# Altium PCB SensWear-V1R2-Debug.PcbDoc (part 1 of 3)
Units mm, origin at the board's own origin, x right, y up, seen from the top; angles counter-clockwise.
Board outline 25 x 25 mm, 4 copper layers (Top, L2, L3, Bottom), stack 1.582 mm thick; 73 components, 63 nets, 295 pads, 106 vias.
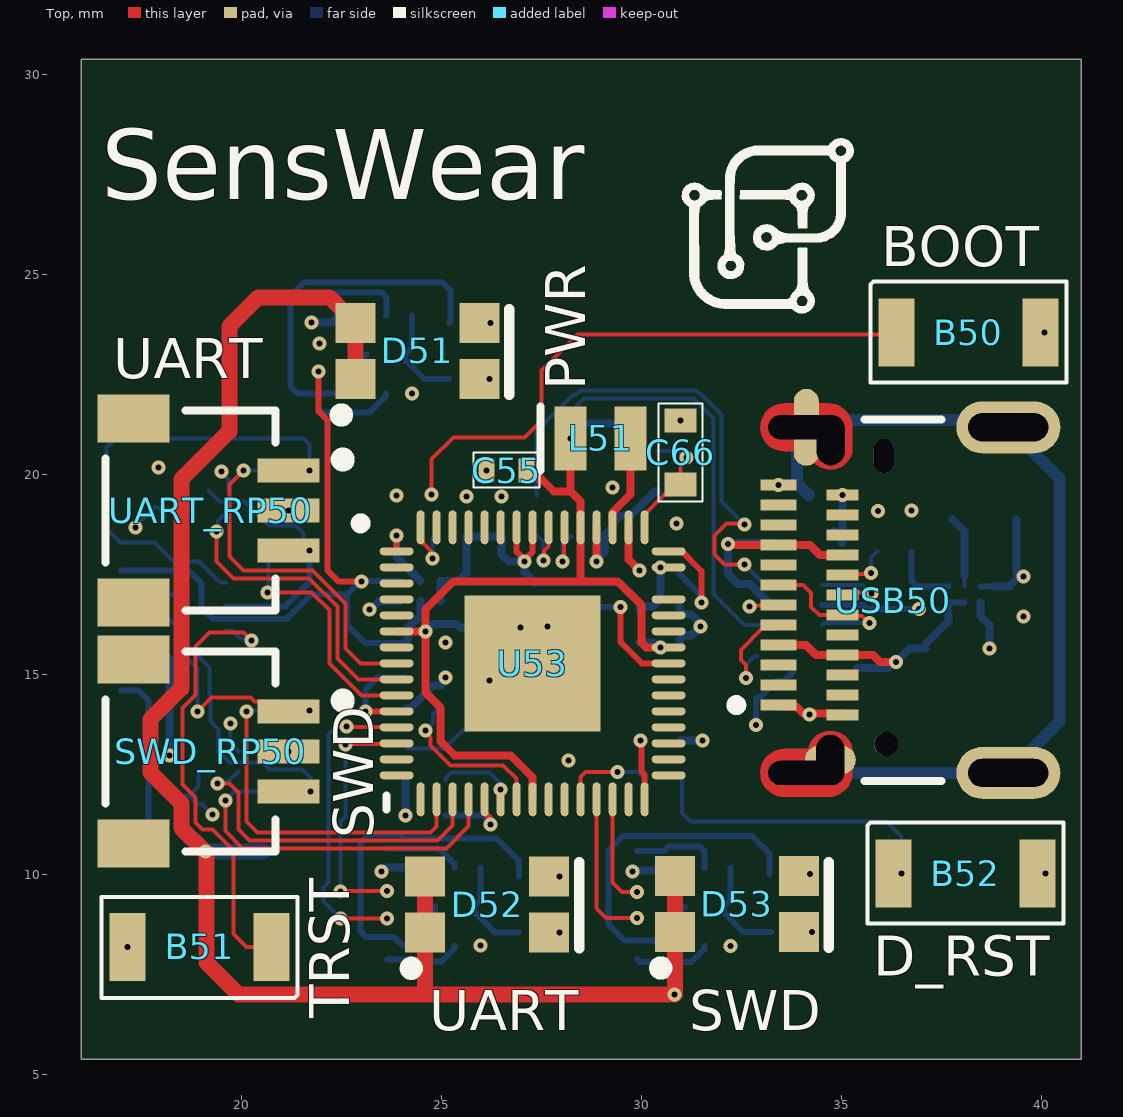
[diagram p0: Top view]
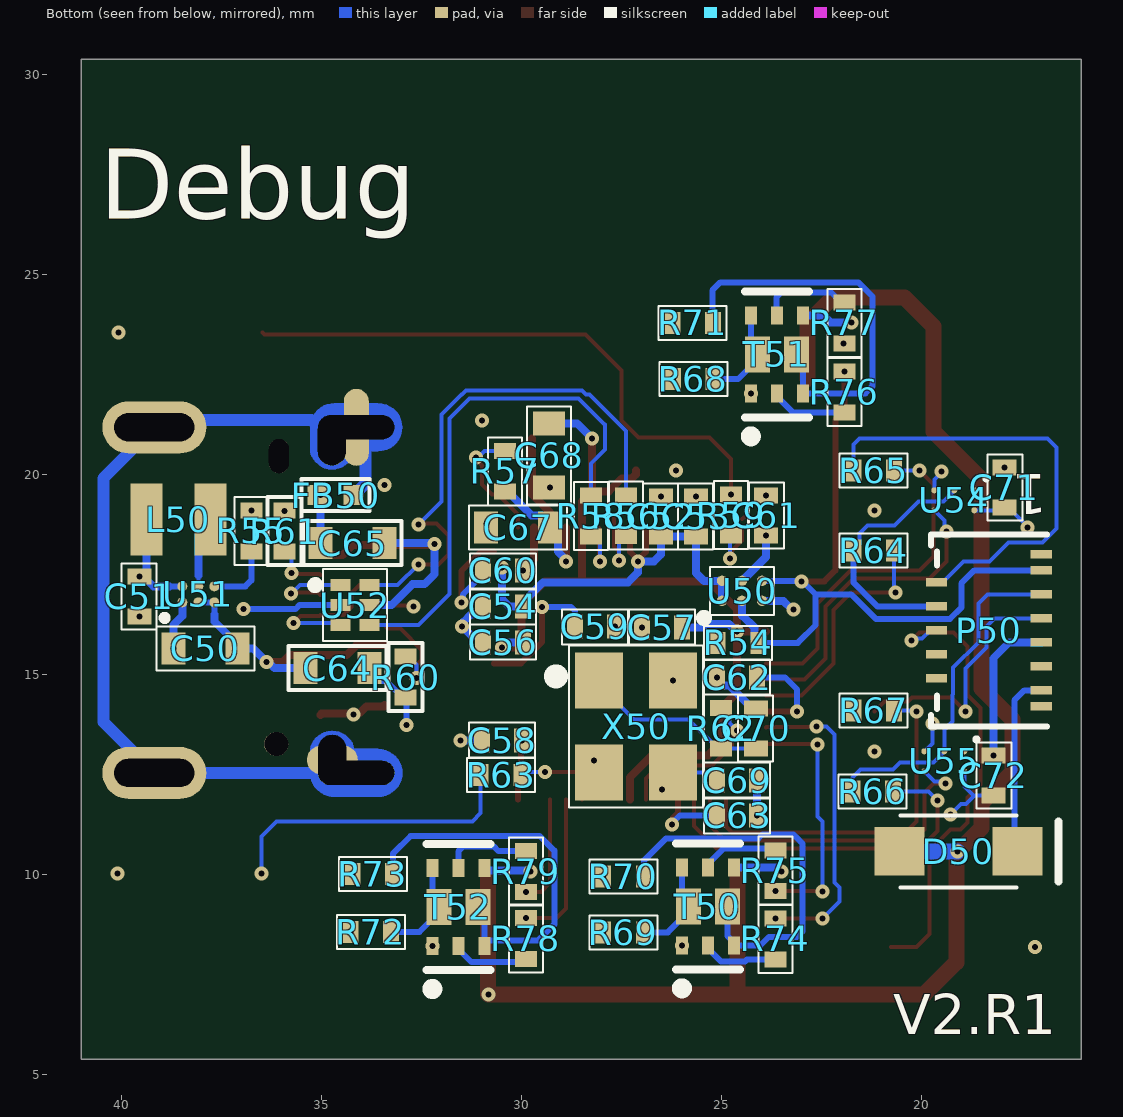
[diagram p1: Bottom view, seen from below]
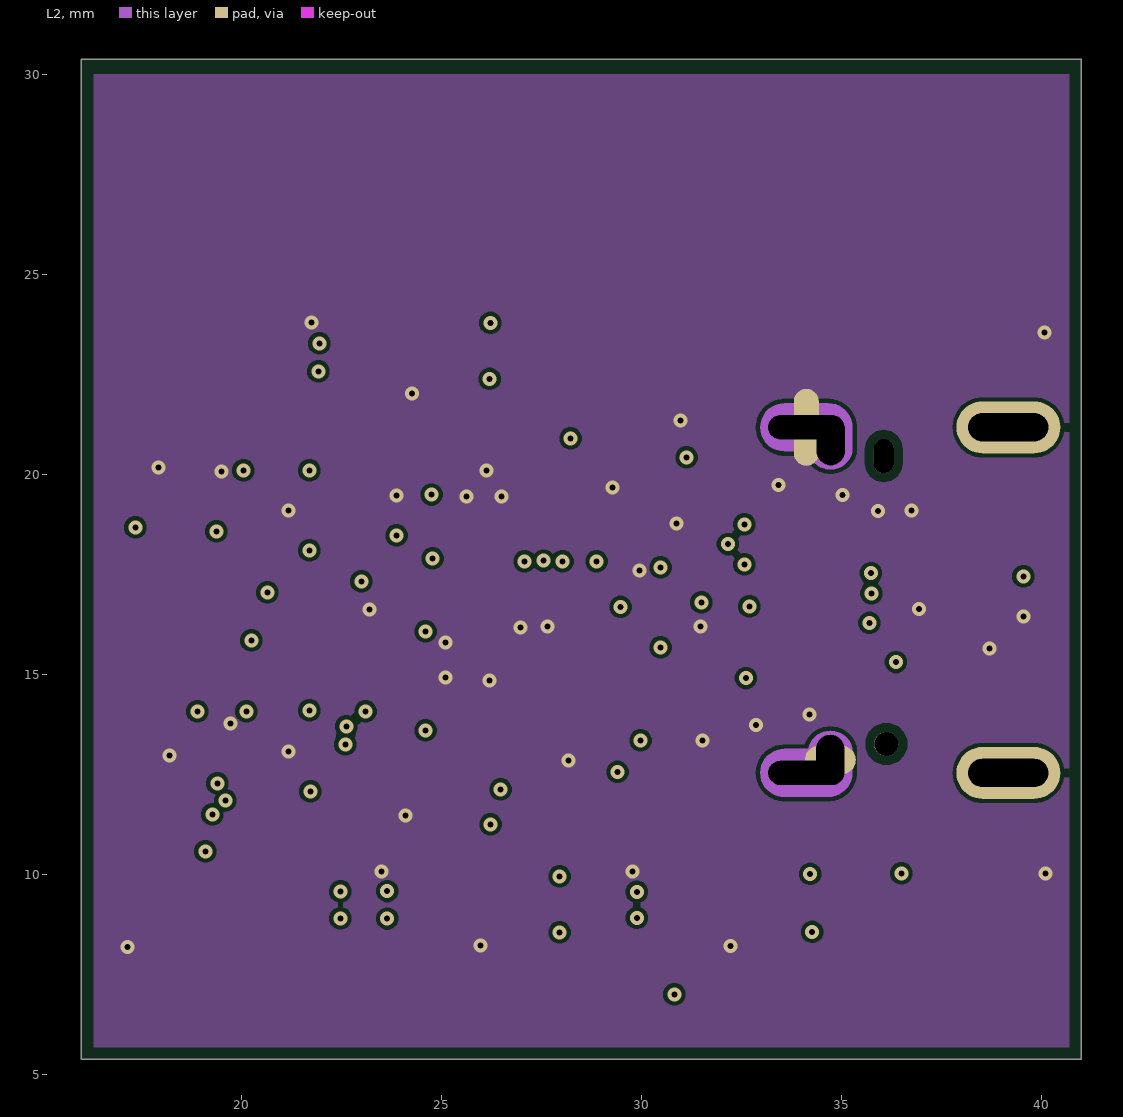
[diagram p2: L2]
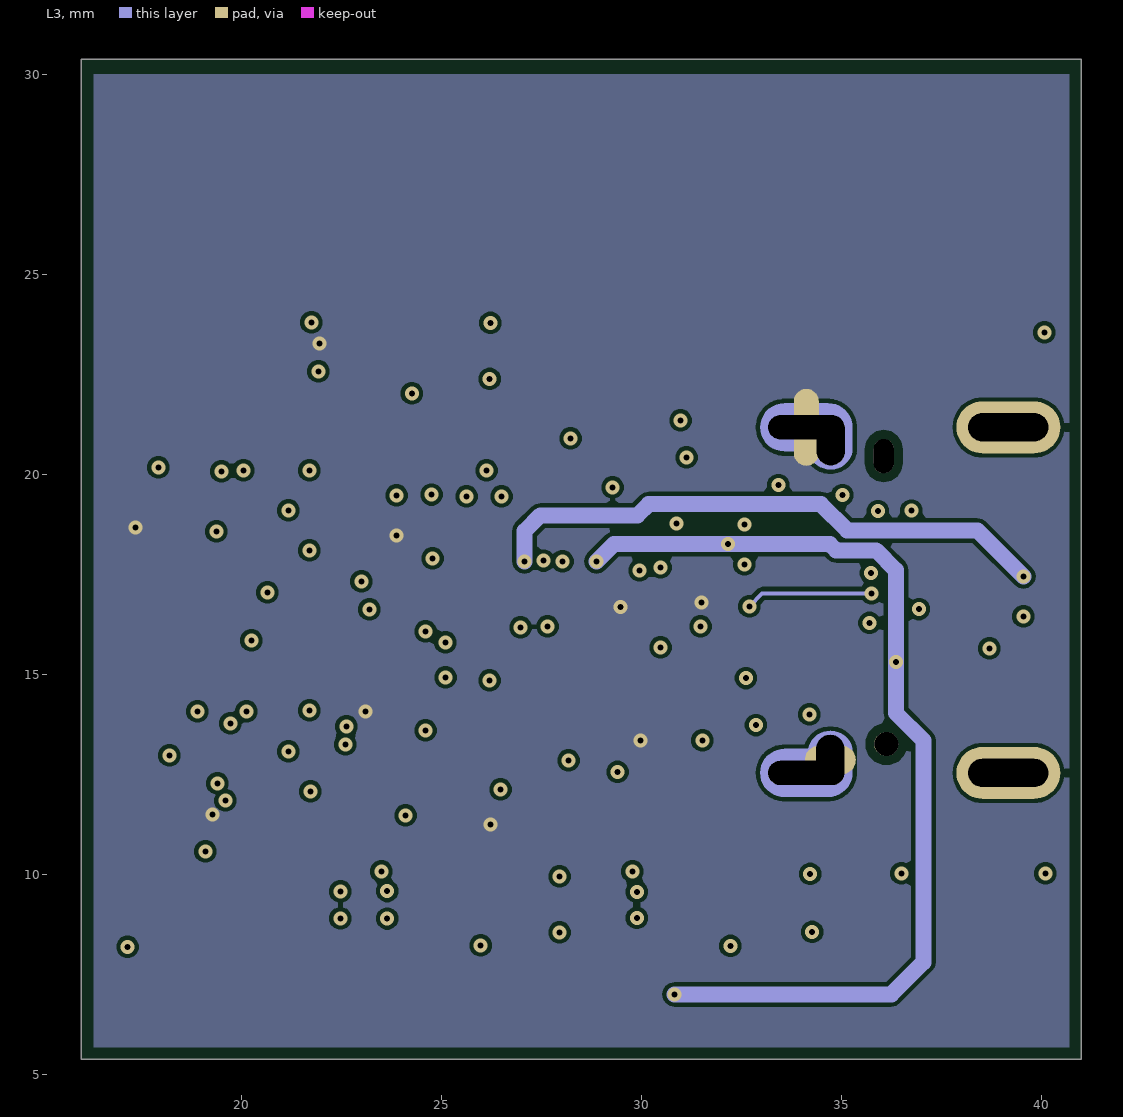
[diagram p3: L3]
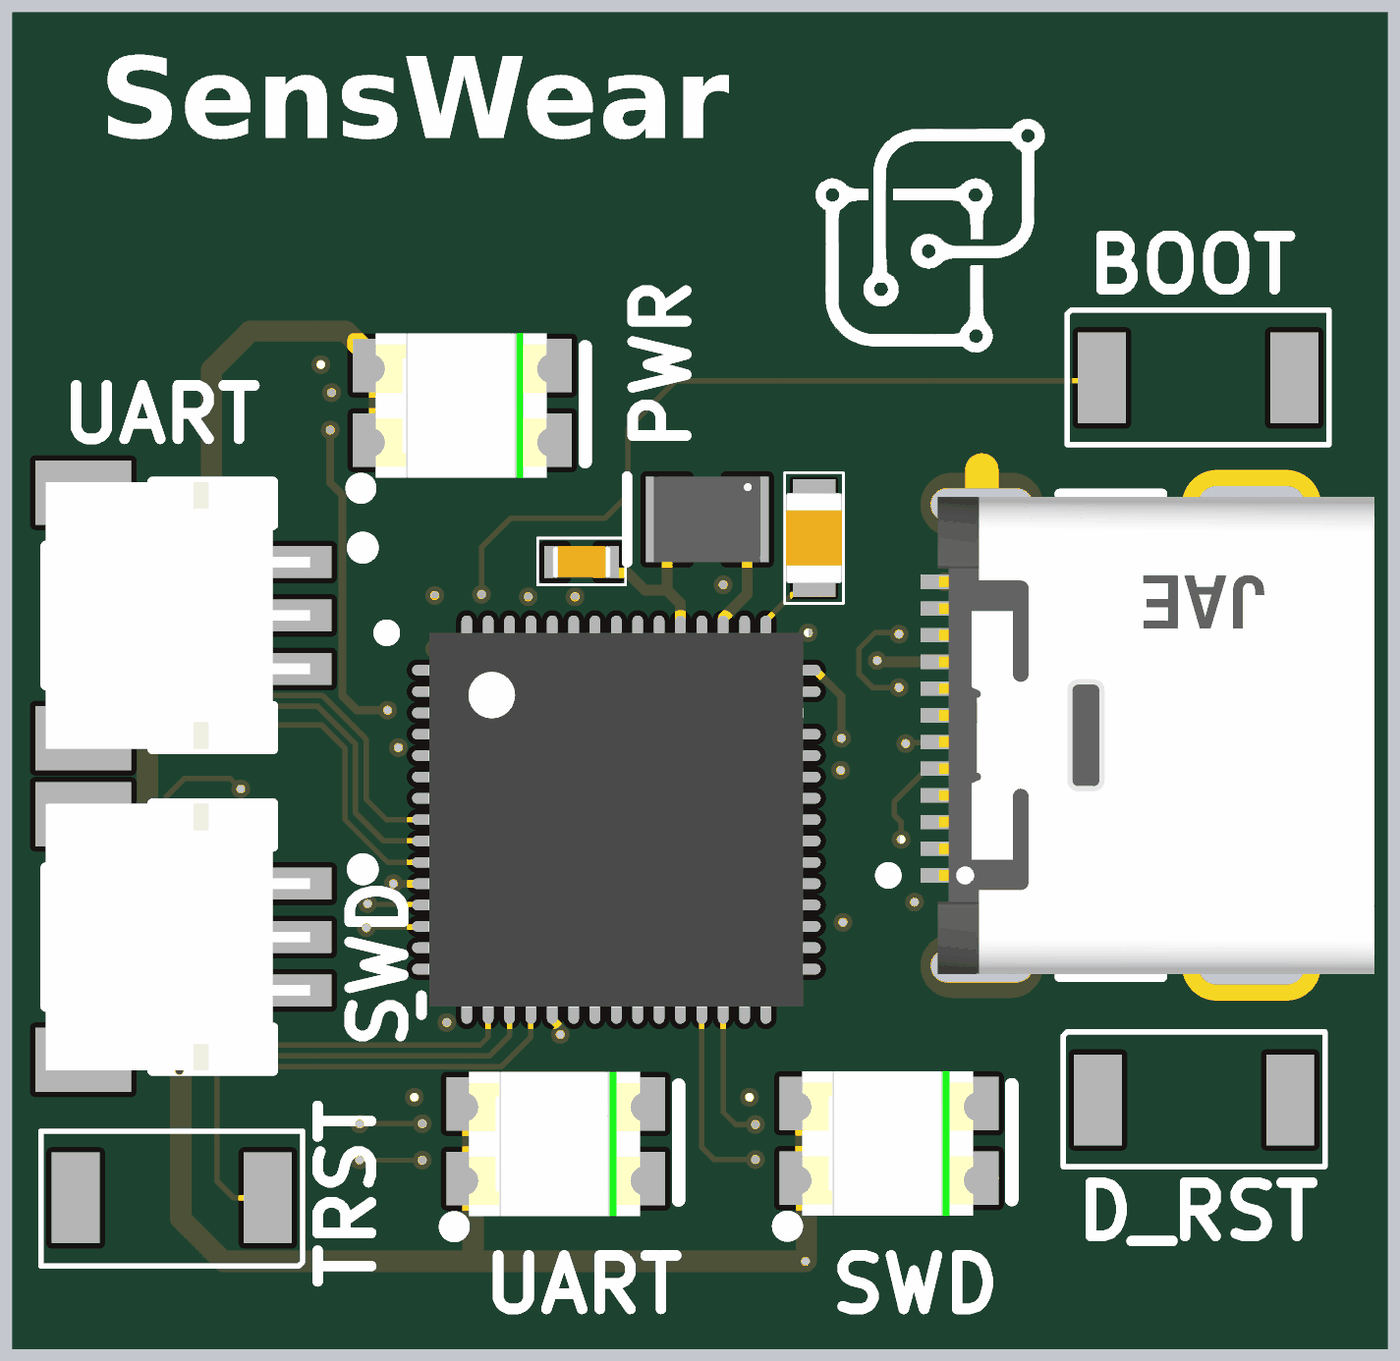
[diagram p5: 3D render of the assembled board from above, using the file's embedded part models]
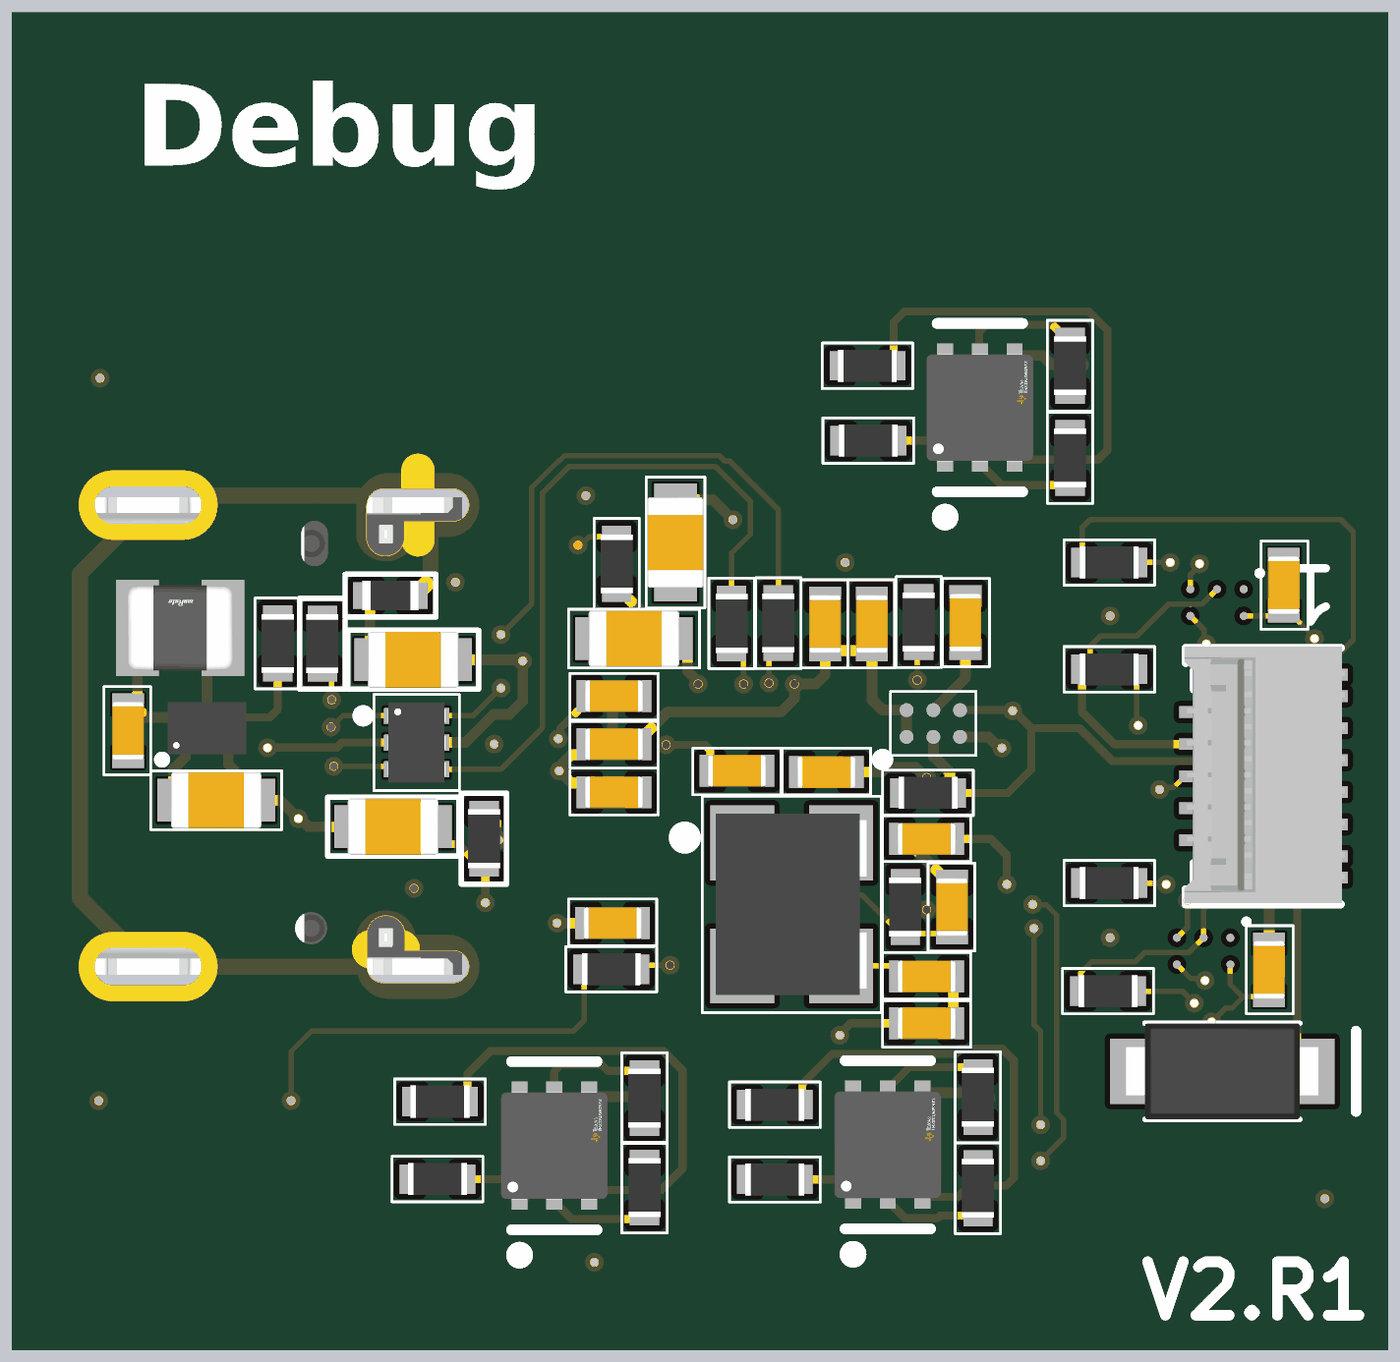
[diagram p6: 3D render of the assembled board from below, using the file's embedded part models]

## Layer stack, top to bottom
Top Mask: solder mask 0.015, Solder Resist, Dk 3.8
Top: signal copper 0.035
Dielectric 1: prepreg 0.2083, PP-022, Dk 4.15
L2: signal copper 0.0152
Core 2: core 1.065, Core-042, Dk 4.35
L3: signal copper 0.0152
Dielectric 3: prepreg 0.2083, PP-022, Dk 4.15
Bottom: signal copper 0.035
Bottom Mask: solder mask 0.015, Solder Resist, Dk 3.8

## Board outline
16,5.375 41,5.375 41,30.375 16,30.375

## Design rules (kind name [scope] priority, off if disabled: settings)
AcuteAngle [All] p1: minimum=4.50000000000000E+0001 checktracksonly=FALSE
AssemblyTestPointUsage [All] p1 off:
AssemblyTestpoint [All] p1 off: testpointundercomponent=TRUE minsize=1.016 maxsize=2.54 preferedsize=1.524 minholesize=0 maxholesize=1.016 preferedholesize=0.813 testpointgrid=0.025 usegrid=TRUE gridtolerance=0 allowsidetop=TRUE allowsidebottom=TRUE
BoardOutlineClearance BoardOutlineClearance_USB [InComponent('USB1')] p1: gap=0 ignorepadtopadclearanceinfootprint=FALSE
BoardOutlineClearance [All] p2: gap=0.3 ignorepadtopadclearanceinfootprint=FALSE
Clearance Clearance_USB_Self [InComponent('USB1') vs InComponent('USB1')] p1: gap=0 ignorepadtopadclearanceinfootprint=TRUE
Clearance Clearance_USB [(Name = 'USB1-S1') OR (Name = 'USB1-S2') OR (Name = 'USB1-S3') OR (Name = 'USB1-S4')] p2: gap=0 ignorepadtopadclearanceinfootprint=FALSE
Clearance "Clearance Non Plated Holes" [IsPad and not PadIsPlated and OnMultiLayer] p3: gap=0.22 ignorepadtopadclearanceinfootprint=FALSE
Clearance Clearance_RF_Nets [IsTrack And InNetClass('50Ohm') vs InNet('GND')] p4: gap=0.1 ignorepadtopadclearanceinfootprint=FALSE
Clearance Clearance_RF_Diff_Pairs [IsTrack And (OnLayer('L1') Or OnLayer('L8')) And InDifferentialPair('RF_ANT_9') vs (InNet('GND') AND InPolygon)] p5: gap=0.1 ignorepadtopadclearanceinfootprint=FALSE except(0: Arc-Hole Track-Hole SMDPad-Hole THPad-Hole Via-Hole Fill-Hole Poly-Hole Region-Hole Text-Hole)
Clearance "Pad Clearance" [IsPad vs IsPad] p6: gap=0.15 ignorepadtopadclearanceinfootprint=FALSE except(0: Arc-Hole Track-Hole SMDPad-Hole THPad-Hole Via-Hole Fill-Hole Poly-Hole Region-Hole Text-Hole)
Clearance uViaClearance [ISVia and InDrillLayerPair('L1 - L2 (GND)') vs ISPad] p7: gap=0.1 ignorepadtopadclearanceinfootprint=FALSE except(0: Arc-Hole Track-Hole SMDPad-Hole THPad-Hole Via-Hole Fill-Hole Poly-Hole Region-Hole Text-Hole)
Clearance "Pad Clearance_1" [IsPad vs IsTrack] p8: gap=0.1 ignorepadtopadclearanceinfootprint=FALSE except(0: Arc-Hole Track-Hole SMDPad-Hole THPad-Hole Via-Hole Fill-Hole Poly-Hole Region-Hole Text-Hole)
Clearance "Poly to Poly Outer Layers" [IsRegion AND (OnLayer('L1') OR OnLayer('L8')) vs IsRegion or IsTrack] p9: gap=0.1 ignorepadtopadclearanceinfootprint=FALSE except(0: Arc-Hole Track-Hole SMDPad-Hole THPad-Hole Via-Hole Fill-Hole Poly-Hole Region-Hole Text-Hole)
Clearance Clearance_KeepOutComponent [IsComponent vs OnLayer('Keep-Out Layer')] p10: gap=3 ignorepadtopadclearanceinfootprint=FALSE except(0: Arc-Hole Track-Hole SMDPad-Hole THPad-Hole Via-Hole Fill-Hole Poly-Hole Region-Hole Text-Hole)
Clearance Clearance_KeepOutSignal [InNetClass('All Nets') vs OnLayer('Keep-Out Layer')] p11: gap=0.2 ignorepadtopadclearanceinfootprint=FALSE except(0: Arc-Hole Track-Hole SMDPad-Hole THPad-Hole Via-Hole Fill-Hole Poly-Hole Region-Hole Text-Hole)
Clearance [All] p12: gap=0.1 ignorepadtopadclearanceinfootprint=FALSE except(0: Arc-Hole Track-Hole SMDPad-Hole THPad-Hole Via-Hole Fill-Hole Poly-Hole Region-Hole Text-Hole)
ComponentClearance [All] p1: gap=0.1 collisioncheckmode=3 verticalgap=0.254 showdistances=TRUE
DiffPairsRouting DiffPair_BT_RF_ANT [InDifferentialPair ('RF_ANT_9')] p1: maxlimit=0.5 minlimit=0.25 mostfreqgap=0.254 toplayer_maxgap=0.25 toplayer_prefgap=0.25 toplayer_minwidth=0.1 toplayer_maxwidth=0.12 toplayer_prefwidth=0.1 midlayer1_maxgap=0.254 midlayer1_minwidth=0.381 midlayer1_maxwidth=0.381 midlayer1_prefwidth=0.381 midlayer4_prefgap=0.25 midlayer4_minwidth=0.12 midlayer4_maxwidth=0.3 midlayer4_prefwidth=0.15 bottomlayer_prefgap=0.25 bottomlayer_minwidth=0.12 bottomlayer_maxwidth=0.3 bottomlayer_prefwidth=0.15 maxuncoupledlength=12.7
DiffPairsRouting [All] p2 off: maxlimit=0.3 minlimit=0.1 mostfreqgap=0.12 toplayer_minwidth=0.1 toplayer_maxwidth=0.381 toplayer_prefwidth=0.15 midlayer1_maxgap=0.1 midlayer1_prefgap=0.1 midlayer1_minwidth=0.12 midlayer1_maxwidth=0.12 midlayer1_prefwidth=0.12 midlayer4_maxgap=0.1 midlayer4_prefgap=0.1 midlayer4_minwidth=0.12 midlayer4_maxwidth=0.12 midlayer4_prefwidth=0.12 bottomlayer_minwidth=0.1 bottomlayer_maxwidth=0.381 bottomlayer_prefwidth=0.15 maxuncoupledlength=0
FabricationTestPointUsage [All] p1 off: valid=0 allowmultiple=FALSE
FabricationTestpoint [All] p1 off: side=3 testpointundercomponent=TRUE minsize=1.016 maxsize=2.54 preferedsize=1.524 minholesize=0 maxholesize=1.016 preferedholesize=0.813 testpointgrid=0.025 allowsidetop=TRUE allowsidebottom=TRUE usegrid=TRUE gridtolerance=0
FanoutControl Fanout_BGA [IsBGA] p1: bgadir=Out bgaviamode=Centered fanoutstyle=Auto fanoutdirection=OutOnly viagrid=0.025 // Fanout_BGA (Default Rule)
FanoutControl Fanout_LCC [IsLCC] p2: bgadir=Out bgaviamode=Centered fanoutstyle=Auto fanoutdirection=InOnly viagrid=0.025 // Fanout_LCC (Default Rule)
FanoutControl Fanout_SOIC [IsSOIC] p3: bgadir=Out bgaviamode=Centered fanoutstyle=Auto fanoutdirection=InOnly viagrid=0.025 // Fanout_SOIC (Default Rule)
FanoutControl Fanout_Small [(CompPinCount < 5)] p4: bgadir=Out bgaviamode=Centered fanoutstyle=Auto fanoutdirection=OutOnly viagrid=0.025 // Fanout_Small (Default Rule)
FanoutControl Fanout_Default [All] p5: bgadir=Out bgaviamode=Centered fanoutstyle=Auto fanoutdirection=OutOnly viagrid=0.025 // Fanout_Default (Default Rule)
HoleSize [All] p1: absolutevalues=TRUE maxlimit=10 minlimit=0 maxpercent=80.000 minpercent=20.000
HoleToHoleClearance HoleToHoleClearance_USB [InComponent('USB1') vs InComponent('USB1')] p1: gap=0 allowstackedmicrovias=TRUE
HoleToHoleClearance [All] p2: gap=0.2 allowstackedmicrovias=TRUE
MatchedLengths DiffPair_BT_RF_ANTMatchedLengths [InDifferentialPair ('RF_ANT_4')] p1: tolerance=0.5 checknetsindiffpair=FALSE checkdiffpairvsdiffpair=TRUE checkxsignals=TRUE checkothers=TRUE
MaxMinImpedance [InNetClass('uSDHC4')] p1: minimum=49.00 maximum=51.00
MaxMinImpedance MaxMinImpedance_1 [InNetClass('DRAM_BANK0') Or InNetClass('DRAM_BANK1') Or InNetClass('DRAM_BANK2') Or InNetClass('DRAM_BANK3') Or InNetClass('DRAM_BANK4') Or InNetClass('DRAM_BANK5') Or InNetClass('DRAM_BANK6') Or InNetClass('DRAM_BANK7')] p2: minimum=49.00 maximum=51.00
MinimumAnnularRing MinimumAnnularRing_USB [InComponent('USB1')] p1: minimumring=0
MinimumAnnularRing [All] p2: minimumring=0.1
MinimumSolderMaskSliver [All] p1: minsoldermaskwidth=0.09
NetAntennae [Not InNet('NetL9_1')] p1: netantennaetolerance=0
OvershootFalling [All] p1: maximum=100.0
OvershootRising [All] p1: maximum=100.0
PlaneClearance [not InNet('GND')] p1: clearance=0.3
PlaneConnect GND_VIA_PAD [(InNet('GND') and (IsVia or IsMicroVia or (IsPad And OnMultiLayer)))] p1: planeconnectstyle=Direct reliefexpansion=0.3 reliefentries=4 reliefconductorwidth=0.5 reliefairgap=0.2
PlaneConnect [All] p2: planeconnectstyle=Relief reliefexpansion=0.2 reliefentries=4 reliefconductorwidth=0.3 reliefairgap=0.2
PolygonConnect PolygonConnect_VIA_PAD [IsVia or (IsPad And OnMultiLayer)] p1: thpad.connectstyle=Direct thpad.reliefconductorwidth=0.25 thpad.reliefentries=4 thpad.polygonreliefangle="90 Angle" thpad.airgapwidth=0.25 smdpad.connectstyle=Relief smdpad.reliefconductorwidth=0.25 smdpad.reliefentries=4 smdpad.polygonreliefangle="90 Angle" smdpad.airgapwidth=0.25 via.connectstyle=Direct via.reliefconductorwidth=0.25 via.reliefentries=4 via.polygonreliefangle="90 Angle" via.airgapwidth=0.25
PolygonConnect [All] p2: connectstyle=Relief reliefconductorwidth=0.25 reliefentries=4 polygonreliefangle="90 Angle" airgapwidth=0.3
RoomDefinition RoomDefinition_5 [InComponentClass('Room Definition8') vs False] p1: confinementstyle=ConfineIn formatcopy=TRUE lockcomponents=FALSE outline 20.85,25.05 20.85,20.625 27.35,20.625 27.35,25.05
RoomDefinition RoomDefinition_4 [InComponentClass('Room Definition7') vs False] p2: confinementstyle=ConfineIn formatcopy=TRUE lockcomponents=FALSE outline 16.158,6.138 22.958,6.138 22.958,24.163 16.158,24.163
RoomDefinition RoomDefinition_2 [InComponentClass('Room Definition6') vs False] p3: confinementstyle=ConfineIn formatcopy=TRUE lockcomponents=FALSE outline 22.616,10.899 31.666,10.899 31.666,22.124 22.616,22.124
RoomDefinition RoomDefinition_1 [InComponentClass('Room Definition2') vs False] p4: confinementstyle=ConfineIn formatcopy=TRUE lockcomponents=FALSE outline 31.315,11.585 31.315,22.125 41.825,22.125 41.825,11.585
RoomDefinition [InComponentClass('Room Definition1') vs False] p5: confinementstyle=ConfineIn formatcopy=TRUE lockcomponents=FALSE outline 22.596,11.202 29.325,11.202 29.325,7.226 26.859,7.226 26.859,6.775 24.044,6.775 24.044,7.226 22.596,7.226
RoutingTopology RoutingTopology_DDRAddressAndControls [InNetClass('DDR_AddressAndControls')] p1: topology=Daisy_Simple
RoutingTopology [All] p2: topology=Shortest
RoutingVias RoutingVias_uVias [(IsVia and (ViaSize <= '0.3')) or IsMicroVia] p1: holewidth=0.1 width=0.35 viastyle="Through Hole" minholewidth=0 minwidth=0.3 maxholewidth=0.1 maxwidth=0.35
RoutingVias [IsVia] p2: holewidth=0.15 width=0.35 viastyle="Through Hole" minholewidth=0.15 minwidth=0.35 maxholewidth=0.5 maxwidth=1
SilkToSilkClearance [All] p1: silktosilkclearance=0.05
SilkToSolderMaskClearance SilkscreenOverComponentPads [IsPad] p1: minsilkscreentomaskgap=0 clearancetoexposedcopper=TRUE
SolderMaskExpansion SolderMaskExpansion_Via [isVia] p1: expansion=0 istentingtop=FALSE
SolderMaskExpansion SolderMaskExpansion_AllButVia [Not IsVia] p2: expansion=0.01 istentingtop=FALSE
SolderMaskExpansion [All] p3: expansion=0.102 istentingtop=FALSE
SupplyNets "Schematic Supply Nets_8" [InNet('VDDIO')] p1: voltage=0.000
SupplyNets "Schematic Supply Nets_7" [InNet('3V3')] p2: voltage=0.000
SupplyNets "Schematic Supply Nets_6" [InNet('GND')] p3: voltage=0.000
SupplyNets "Schematic Supply Nets_4" [InNet('1V1')] p4: voltage=0.000
SupplyNets "Schematic Supply Nets_3" [InNet('CHG_AC')] p5: voltage=0.000
SupplyNets "Schematic Supply Nets_2" [InNet('V_SYS')] p6: voltage=0.000
SupplyNets "Schematic Supply Nets_1" [InNet('1V8')] p7: voltage=0.000
UnRoutedNet [All] p1: checkbadconnections=TRUE
UndershootFalling [All] p1: maximum=100.0
UndershootRising [All] p1: maximum=100.0
UnpouredPolygon [All] p1: allowshelved=TRUE
ViasUnderSMD [All] p1: allowed=TRUE
Width BT_RF_ANT_DIFF_PAIR [InDifferentialPairClass('RF_ANT_9')] p1: maxlimit=0.18 minlimit=0.1 preferedwidth=0.152 toplayer_maxwidth=0.15 toplayer_prefwidth=0.1 midlayer1_minwidth=0.127 midlayer4_minwidth=0.12 midlayer4_maxwidth=0.15 midlayer4_prefwidth=0.13 bottomlayer_minwidth=0.12 bottomlayer_maxwidth=0.15 bottomlayer_prefwidth=0.13 minimp=37.500000 maximp=47.500000 favimp=42.500000
Width "Width Ground" [InNet('GND')] p2: maxlimit=40 minlimit=0.1 preferedwidth=0.4
Width [All] p3: maxlimit=2 minlimit=0.051 preferedwidth=0.1
8 further rules are at their usual default settings.

## Classes and differential pairs
component class "Room Definition8": D51 R68 R71 R76 R77 T51
component class "Room Definition7": B51 C71 C72 D50 P50 R64 R65 R66 R67 SWD_RP50 U54 U55 UART_RP50
component class "Room Definition6": C52 C53 C54 C55 C56 C57 C58 C59 C60 C61 C62 C63 C66 C67 C68 C69 C70 L51 R54 R56 R57 R58 R59 R62 R63 U50 U53 X50
component class "Room Definition5": D53 R72 R73 R78 R79 T52
component class "Room Definition4": D53 R72 R73 R78 R79
component class "Room Definition3": C52 C53 C54 C55 C56 C57 C58 C59 C60 C61 C62 C63 C66 C67 C68 C69 C70 L51 R56 R57 R58 R59 R62 U53 X50
component class "Room Definition2": C64 C65 FB50 R60 R61 U52 USB50
component class "Room Definition1": D52 R69 R70 R74 R75 T50
net class U_SensWear_Debug_Pico_Nets: 1V1 1V8 3V3 CC1 CC2 D_N D_P GND LED_SWD_GREEN LED_SWD_RED LED_UART_GREEN LED_UART_RED MCU_R\E\S\E\T\ MCU_RX MCU_SWD_CLK MCU_SWD_IO MCU_TX NetB52_2 NetC66_2 NetC69_2 NetC70_2 NetD51_3 NetD51_4 NetD52_3 NetD52_4 NetD53_3 NetD53_4 NetFB50_2 NetL50_1 NetL51_2 NetR55_2 NetR56_1 NetR58_1 NetR59_2 NetR62_2 NetR63_2 NetR68_1 NetR69_1 NetR70_1 NetR71_1 NetR72_1 NetR73_1 NetR74_2 NetR75_2 NetR76_2 NetR77_2 NetR78_2 NetR79_2 NetSWD_RP50_MP1 NetSWD_RP50_MP2 NetU53_2 NetU53_3 NetU53_4 NetU53_5 NetU53_7 NetU53_14 NetU53_15 NetU53_16 NetU53_24 NetU53_25 NetU53_29 NetU53_31 NetU53_32 NetU53_33 NetU53_34 NetU53_35 NetU53_36 NetU53_37 NetU53_40 NetU53_41 NetU53_42 NetU53_43 NetU53_55 NetU53_56 NetU53_57 NetU53_58 NetU53_59 NetU53_61 NetU54_A1 NetU55_A1 NetUART_RP50_MP1 NetUART_RP50_MP2 NetUSB50_A2 NetUSB50_A3 NetUSB50_A8 NetUSB50_A10 NetUSB50_A11 NetUSB50_B2 NetUSB50_B3 NetUSB50_B8 NetUSB50_B10 NetUSB50_B11 T_SWD_CLK T_SWD_IO T_SWD_IO_FLT T_UART_RX T_UART_RX_FLT T_UART_TX USB_BOOT_SEL USB_D_N USB_D_P V_SYS VDDIO
net class U_DebugConnector_Nets: 1V8 CHG_AC GND MCU_R\E\S\E\T\ MCU_RX MCU_SWD_CLK MCU_SWD_IO MCU_TX MPU_R\E\S\E\T\ MPU_SWD_CLK MPU_SWD_DIO V_SYS
component class U_DebugConnector: D50 P50
differential pair USB_D: +USB_D_P -USB_D_N
differential pair D: +D_P -D_N

## Components (designator, comment, footprint, x,y, rotation, side; value= is the part's Value field where it differs from the comment)
B50 "B3U-1000P" B3U-1000P 38.175,23.55 r180 top
B51 "B3U-1000P" B3U-1000P 18.958,8.188 r0 top
B52 "B3U-1000P" B3U-1000P 38.1,10.025 r180 top
C50 "4.7 uF" CAPC1610X05N 37.9,15.65 r180 bottom
C51 "4.7uF" CAPC1005X05N#1 39.55,16.95 r270 bottom
C52 "0.1 uF" CAPC1005X05N#2 26.508,18.95 r270 bottom
C53 "0.1 uF" CAPC1005X05N#2 25.633,18.95 r270 bottom
C54 "0.1 uF" CAPC1005X05N#2 30.458,16.7 r180 bottom
C55 "0.1 uF" CAPC1005X05N#2 26.633,20.1 r180 top
C56 "0.1 uF" CAPC1005X05N#2 30.458,15.8 r0 bottom
C57 "0.1 uF" CAPC1005X05N#2 26.483,16.175 r0 bottom
C58 "0.1 uF" CAPC1005X05N#2 30.483,13.35 r0 bottom
C59 "0.1 uF" CAPC1005X05N#2 28.158,16.2 r180 bottom
C60 "0.1 uF" CAPC1005X05N#2 30.458,17.6 r180 bottom
C61 "0.1 uF" CAPC1005X05N#2 23.883,18.975 r90 bottom
C62 "0.1 uF" CAPC1005X05N#2 24.608,14.925 r0 bottom
C63 "0.1 uF" CAPC1005X05N#2 24.608,11.475 r180 bottom
C64 "4.7 uF" CAPC1610X05N 34.59,15.155 r0 bottom
C65 "4.7 uF" CAPC1610X05N 34.215,18.28 r180 bottom
C66 "4.7 uF" CAPC1610X05N 30.983,20.55 r270 top
C67 "4.7 uF" CAPC1610X05N 30.083,18.675 r180 bottom
C68 "4.7 uF" CAPC1610X05N 29.308,20.475 r90 bottom
C69 "15pF" CAPC1005X05N#2 24.608,12.35 r0 bottom
C70 "15pF" CAPC1005X05N#2 24.133,13.65 r270 bottom
C71 "0.1 uF" CAPC1005X05N#1 17.925,19.675 r90 bottom
C72 "0.1 uF" CAPC1005X05N#1 18.2,12.475 r90 bottom
D50 "MBR140SFT1G" SODFL360X110-2N 19.075,10.575 r0 bottom
D51 "LTST-C155KGJRKT" LTST-C155KGJRKT 24.2,23.083 r180 top
D52 "LTST-C155KGJRKT" LTST-C155KGJRKT 25.948,9.25 r180 top
D53 "LTST-C155KGJRKT" LTST-C155KGJRKT 32.187,9.258 r180 top
FB50 "BLM15AG601SN1D" MURA-BLM15-CHIP-2_V 34.64,19.48 r180 bottom
L50 "2.2 uH" FP-DFE201612C-MFG 38.575,18.875 r0 bottom
L51 "3.3µH" AOTAB201610S3R3101T 28.983,20.9 r0 top
P50 "504754-1100" 5047541100__3 18.31,16.1 r90 bottom
R54 "1 M" RESC1005X04N 24.583,15.786 r0 bottom
R55 "267kΩ" RESC1005X04N 36.75,18.585 r270 bottom
R56 "27Ω" RESC1005X04N 27.383,18.965 r90 bottom
R57 "33R" RESC1005X04N 30.408,20.075 r90 bottom
R58 "27Ω" RESC1005X04N 28.258,18.96 r90 bottom
R59 "1 k" RESC1005X04N 24.758,18.985 r270 bottom
R60 "5.1 k" RESC1005X04N 32.89,14.93 r270 bottom
R61 "5.1 k" RESC1005X04N 35.915,18.58 r90 bottom
R62 "1 k" RESC1005X04N 25.008,13.65 r90 bottom
R63 "1 k" RESC1005X04N 30.508,12.486 r180 bottom
R64 "100 R" RESC1005X04N 21.19,18.1 r180 bottom
R65 "100 R" RESC1005X04N 21.19,20.1 r180 bottom
R66 "100 R" RESC1005X04N 21.215,12.075 r180 bottom
R67 "100 R" RESC1005X04N 21.19,14.1 r180 bottom
R68 "620 R" RESC1005X04N 25.7,22.383 r0 bottom
R69 "620 R" RESC1005X04N 27.448,8.55 r0 bottom
R70 "620 R" RESC1005X04N 27.448,9.95 r0 bottom
R71 "620 R" RESC1005X04N 25.715,23.783 r0 bottom
R72 "620 R" RESC1005X04N 33.762,8.558 r0 bottom
R73 "620 R" RESC1005X04N 33.712,10.008 r0 bottom
R74 "1 k" RESC1005X04N 23.648,8.385 r270 bottom
R75 "1 k" RESC1005X04N 23.648,10.09 r90 bottom
R76 "1 k" RESC1005X04N 21.925,22.058 r270 bottom
R77 "1 k" RESC1005X04N 21.925,23.783 r90 bottom
R78 "1 k" RESC1005X04N 29.887,8.398 r270 bottom
R79 "1 k" RESC1005X04N 29.887,10.073 r90 bottom
SWD_RP50 "SM03B-SRSS-TB(LF)(SN)" JST-SM03B-SRSS-TB_V 18.725,13.075 r270 top
T50 "CSD87502Q2" FP-DQK0006B-MFG 25.335,9.2 r90 bottom
T51 "CSD87502Q2" FP-DQK0006B-MFG 23.612,23 r90 bottom
T52 "CSD87502Q2" FP-DQK0006B-MFG 31.575,9.183 r90 bottom
U50 "FPF1320UCX" BGA6C50P2X3_96X146X62 24.483,17.086 r90 bottom
U51 "TPS62840YBGR" BGA6C40P2X3_97X147X50 38.075,17 r90 bottom
U52 "PRTR5V0U2F" SON50P100X50-6N 34.153,16.73 r270 bottom
U53 "RP2354A" QFN40P700X700X90_HS-61N 27.283,15.275 r0 top
U54 "SN74LVC1G17YZPR" YZP0005ADAD 19.175,19.35 r270 bottom
U55 "SN74LVC1G17YZPR" YZP0005ADAD 19.425,12.825 r270 bottom
UART_RP50 "SM03B-SRSS-TB(LF)(SN)" JST-SM03B-SRSS-TB_V 18.725,19.1 r270 top
USB50 "DX07S024JJ3R1300" JAE-DX07S024JJ3R1300-MFG 37.39,16.855 r90 top
X50 "12MHz" DFN165P250X80-4N 27.133,13.7 r270 bottom

## Footprints (in the part's own frame and the unit in brackets; to place one, negate y for a bottom-side part, rotate by r counter-clockwise, add the part's x,y. Pads: shape width x height; smd on the part's side, far side on the other; paste and mask are expansions set on the pad)
5047541100__3 [mm]
  rect 0.22x0.54 smd: 1(-1.5,-1.31) 3(-0.9,-1.31) 5(-0.3,-1.31) 7(0.3,-1.31) 9(0.9,-1.31) 11(1.5,-1.31) P1(-1.9,-1.31) P2(1.9,-1.31)
  rect 0.22x0.53 smd: 2(-1.2,1.31) 4(-0.6,1.31) 6(0,1.31) 8(0.6,1.31) 10(1.2,1.31)
  silkscreen extent -2.4,-1.45 2.4,1.45, body extent -2.37,-1.53 2.43,1.48, height 1.46
AOTAB201610S3R3101T [mm]
  rect 0.8x1.6 smd: 1(-0.75,0) 2(0.75,0)
  silkscreen extent -1.5,-0.8 -1.5,0.8, body extent -1,-0.8 1,0.8, height 1
B3U-1000P [mm]
  rect 0.9x1.7 smd: 1(-1.8,0) 2(1.8,0)
  silkscreen extent -2.45,-1.28 2.45,1.25, body extent -2,-1.25 2,1.25, height 1.6
BGA6C40P2X3_97X147X50 [mm] "BGA, 6-Leads, Body 0,97x1,47mmx0,50mm, Pitch 0,40mm"
  round 0.25 smd paste+0 mask+0: A1(-0.2,0.4) A2(0.2,0.4) B1(-0.2,0) B2(0.2,0) C1(-0.2,-0.4) C2(0.2,-0.4)
  silkscreen extent -0.64,0.79 -0.54,0.89, body extent -0.49,-0.73 0.49,0.73, height 0.5
BGA6C50P2X3_96X146X62 [mm] "BGA, 6-Leads, Body 0.96x1.46mmx0.63mm, Pitch 0.50mm"
  round 0.26 smd paste+0 mask+0: A1(-0.25,0.5) A2(0.25,0.5) B1(-0.25,0) B2(0.25,0) C1(-0.25,-0.5) C2(0.25,-0.5)
  silkscreen extent -0.72,-0.8 0.6,1, body extent -0.48,-0.73 0.48,0.73, height 0.63
CAPC1005X05N#1 [mm] "Chip Capacitor, 2-Leads, Body 1.00x0.50mm, IPC Medium Density"
  rect 0.4x0.6 smd mask+0.04: 1(-0.5,0) 2(0.5,0)
  silkscreen extent -0.82,-0.45 0.82,0.43, body extent -0.55,-0.3 0.55,0.3, height 0.6
CAPC1005X05N#2 [mm] "Chip Capacitor, 2-Leads, Body 1.00x0.50mm, IPC Medium Density"
  rect 0.4x0.6 smd: 1(-0.5,0) 2(0.5,0)
  silkscreen extent -0.82,-0.45 0.82,0.43, body extent -0.55,-0.3 0.55,0.3, height 0.6
CAPC1610X05N [mm] "Chip Capacitor, 2-Leads, Body 1.60x1.00mm, IPC Medium Density"
  rect 0.6x0.8 smd mask+0.05: 1(-0.8,0) 2(0.8,0)
  silkscreen extent -1.22,-0.55 1.22,0.55, body extent -0.85,-0.52 0.85,0.53, height 1
DFN165P250X80-4N [mm] "DFN, 4-Leads, Body 3.20x2.50mm, Pitch 1.65mm, IPC Medium Density"
  rect 1.4x1.2 smd: 1(-1.15,-0.925) 2(1.15,-0.925) 3(1.15,0.925) 4(-1.15,0.925)
  silkscreen extent -2.02,-2.05 2.02,1.68, body extent -1.7,-1.42 1.7,1.4, height 0.8
FP-DFE201612C-MFG [mm]
  rect 0.8x1.8 smd paste+0 mask+0: 1(-0.8,0) 2(0.8,0)
  body extent -1,-0.8 1,0.8, height 1.2
FP-DQK0006B-MFG [mm]
  rect 0.45x0.3 smd paste+0 mask+0: 1(-0.975,0.65) 2(-0.975,0) 3(-0.975,-0.65) 4(0.975,-0.65) 5(0.975,0) 6(0.975,0.65)
  rect 0.9x0.625 smd paste-1000 mask+0: 7(0,0.488) 8(0,-0.488)
  silkscreen extent -2.17,-0.8 1.58,0.8, body extent -1,-1 1,1, height 0.8
JAE-DX07S024JJ3R1300-MFG [mm]
  rect 0.27x0.9 smd paste+0 mask+0: A1(-2.625,3.965) A2(-2.125,3.965) A3(-1.625,3.965) A4(-1.125,3.965) A5(-0.625,3.965) A6(-0.125,3.965) A7(0.375,3.965) A8(0.875,3.965) A9(1.375,3.965) A10(1.875,3.965) A11(2.375,3.965) A12(2.875,3.965)
  rect 0.27x0.8 smd paste+0 mask+0: B1(2.625,2.365) B2(2.125,2.365) B3(1.625,2.365) B4(1.125,2.365) B5(0.625,2.365) B6(0.125,2.365) B7(-0.375,2.365) B8(-0.875,2.365) B9(-1.375,2.365) B10(-1.875,2.365) B11(-2.375,2.365) B12(-2.875,2.365)
  rrect100% 0.6x1.9 hole 1.9 slot 0.6 at 0 deg paste-2539.97 mask+0: S1(-4.32,3.265)
  oval 0.725x1.275 hole 0.7 slot 1.25 at 0 deg paste-2539.97 mask+0: S1(-3.995,2.665)
  rrect100% 1.25x0.7 hole 0.7 slot 1.25 at 0 deg paste-2539.97 mask+0: S2(3.995,2.655)
  oval 1.925x0.625 hole 1.9 slot 0.6 at 0 deg paste-2539.97 mask+0: S2(4.32,3.265)
  rrect100% 1.3x2.6 hole 2 slot 0.7 at 0 deg paste-2539.97 mask+0: S3(-4.32,-1.785) S4(4.32,-1.785)
  round 0.6 hole 0.6 unplated paste-2539.97 mask+0: ""(-3.6,1.265)
  rrect100% 0.85x0.5 hole 0.5 slot 0.85 at 0 deg unplated paste-2539.97 mask+0: ""(3.6,1.33)
  silkscreen extent -4.52,-0.11 4.52,5.14, body extent -4.47,-4.09 4.47,4.09, height 3.29
JST-SM03B-SRSS-TB_V [mm] "SMD, 3-Leads, Body 5x4.25mm, Pitch 1mm"
  rect 0.6x1.55 smd: 1(-1,2.45) 2(0,2.45) 3(1,2.45)
  rect 1.2x1.8 smd: MP1(-2.3,-1.425) MP2(2.3,-1.425)
  silkscreen extent -2.5,-2.12 2.5,3.86, body extent -2.5,-2.12 2.5,2.83, height 3.25
LTST-C155KGJRKT [mm]
  rect 1x1 smd: 1(1.35,0.7) 2(1.35,-0.7) 3(-1.75,0.7) 4(-1.75,-0.7)
  silkscreen extent -2.5,-1.05 1.84,1.74, body extent -1.77,-1.3 1.43,1.4, height 1.1
MURA-BLM15-CHIP-2_V [mm] "Chip Ferrite Bead, 2-Leads, Body 1x0.5mm"
  rect 0.5x0.5 smd: 1(-0.45,0) 2(0.45,0)
  silkscreen extent -0.85,-0.4 0.85,0.4, body extent -0.52,-0.28 0.53,0.28, height 0.55
QFN40P700X700X90_HS-61N [mm] "QFN, 60-Leads, Body 7.00x7.00mm, Pitch 0.40mm, Thermal Pad 3.40x3.40mm, IPC Medium Density"
  oval 0.85x0.2 smd: 1(-3.4,2.8) 2(-3.4,2.4) 3(-3.4,2) 4(-3.4,1.6) 5(-3.4,1.2) 6(-3.4,0.8) 7(-3.4,0.4) 8(-3.4,0) 9(-3.4,-0.4) 10(-3.4,-0.8) 11(-3.4,-1.2) 12(-3.4,-1.6) 13(-3.4,-2) 14(-3.4,-2.4) 15(-3.4,-2.8) 31(3.4,-2.8) 32(3.4,-2.4) 33(3.4,-2) 34(3.4,-1.6) 35(3.4,-1.2) 36(3.4,-0.8) 37(3.4,-0.4) 38(3.4,0) 39(3.4,0.4) 40(3.4,0.8) 41(3.4,1.2) 42(3.4,1.6) 44(3.4,2.4) 45(3.4,2.8)
  oval 0.2x0.85 smd: 16(-2.8,-3.4) 17(-2.4,-3.4) 18(-2,-3.4) 19(-1.6,-3.4) 20(-1.2,-3.4) 21(-0.8,-3.4) 22(-0.4,-3.4) 23(0,-3.4) 24(0.4,-3.4) 25(0.8,-3.4) 26(1.2,-3.4) 27(1.6,-3.4) 28(2,-3.4) 29(2.4,-3.4) 30(2.8,-3.4) 46(2.8,3.4) 47(2.4,3.4) 48(2,3.4) 49(1.6,3.4) 50(1.2,3.4) 51(0.8,3.4) 52(0.4,3.4) 53(0,3.4) 54(-0.4,3.4) 55(-0.8,3.4) 56(-1.2,3.4) 57(-1.6,3.4) 58(-2,3.4) 59(-2.4,3.4) 60(-2.8,3.4)
  rect 3.4x3.4 smd: 61(0,0)
  silkscreen extent -4.42,-3.65 -3.65,3.62, body extent -3.51,-3.51 3.51,3.51, height 0.9
RESC1005X04N [mm] "Chip Resistor, 2-Leads, Body 1.00x0.50mm, IPC Medium Density"
  rect 0.4x0.55 smd: 1(-0.51,0) 2(0.51,0)
  silkscreen extent -0.85,-0.43 0.85,0.43, body extent -0.55,-0.3 0.55,0.3, height 0.6
SODFL360X110-2N [mm] "SODFL, 2-Leads, Body 1.65x3.60mm, IPC Medium Density"
  rect 1.25x1.22 smd: 1(-1.475,0) 2(1.475,0)
  silkscreen extent -2.5,-0.9 1.45,0.9, body extent -1.8,-0.9 1.8,0.9, height 1.1
SON50P100X50-6N [mm] "SON, 6-Leads, Body 1.45x1.00mm, Pitch 0.50mm, IPC Medium Density"
  rect 0.3x0.5 smd mask+0.05: 1(-0.5,-0.362) 2(0,-0.362) 3(0.5,-0.362) 4(0.5,0.363) 5(0,0.363) 6(-0.5,0.363)
  silkscreen extent -0.9,-1.05 0.9,0.8, body extent -0.75,-0.53 0.75,0.54, height 0.5
YZP0005ADAD [mm] "BGA, 5-Balls, Body 1.39x0.89mm, Pitch 0.5mm"
  round 0.15 smd: A1(-0.25,0.5) A2(0.25,0.5) B1(-0.25,0) C1(-0.25,-0.5) C2(0.25,-0.5)
  silkscreen extent -0.6,0.75 -0.5,0.85, body extent -0.45,-0.69 0.45,0.69, height 0.5

## Part data
B50 B51 B52: "SWITCH TACTILE SPST-NO 0.05A 12V", Contact Rating @ Voltage="0.05A @ 12VDC", Illumination Type, Color=-, Manufacturer="Omron Electronics Inc-EMC Div", Operating Force=153gf, Operating Temperature="-25°C ~ 70°C", Supplier Part Number 1=SW1020DKR-ND, Actuator Height off PCB, from Pins=1.60mm, Actuator Material=-, Actuator Orientation="Top Actuated", Actuator Type=Standard, Category=Switches, Circuit=SPST-NO, ComponentLink1Description=http://www.omron.com/ecb/products/pdf/en-b3u.pdf, ComponentLink1URL=http://www.omron.com/ecb/products/pdf/en-b3u.pdf, Features=-, Illumination=Non-Illuminated, Illumination Voltage (Nominal)=-, Ingress Protection="Dust Proof", Manufacturer Part Number=B3U-1000P, Mechanical Life="200,000 Cycles", Mounting Type="Surface Mount", Outline="3.00mm x 2.50mm", Packaging=Digi-Reel®, Part Status=Active, Pricing 1="1=0.93, 10=0.898, 25=0.8468, 50=0.745, 100=0.6774, 250=0.64348, 500=0.62656, 1000=0.49108 (GBP)", RoHS="RoHS Compliant", Stock 1=66079, Supplier 1=Digi-Key, Switch Function=Off-Mom, Switch Travel=0.15mm, Termination Style="SMD (SMT) Tab"
C50 C64 C65 C66 C67 C68: library part GRM188R61A475KE15D, "CAP CER 4.7UF 10V X5R 0603", Capacitance=4.7µF, Manufacturer="Murata Electronics North America", Operating Temperature="-55°C ~ 85°C", Package / Case="0603 (1608 Metric)", Ratings=-, Supplier Part Number 1=490-10477-6-ND, Temperature Coefficient=X5R, Tolerance=±10%, Voltage - Rated=10V, Applications="General Purpose", Category=Capacitors, ComponentLink1Description=http://www.murata.com/~/media/webrenewal/support/library/catalog/products/capacitor/mlcc/c02e.pdf, ComponentLink1URL=http://www.murata.com/~/media/webrenewal/support/library/catalog/products/capacitor/mlcc/c02e.pdf, Features="Derating Recommended", Height - Seated (Max)=-, Lead Spacing=-, Lead Style=-, Manufacturer Part Number=GRM188R61A475KE15D, Mounting Type="Surface Mount, MLCC", Packaging=Digi-Reel®, Part Status=Active, Pricing 1="1=0.1, 10=0.068, 50=0.0392, 100=0.0323, 250=0.0272, 500=0.0228, 1000=0.0187 (GBP)", RoHS="RoHS Compliant", Size / Dimension="0.063\" L x 0.031\" W (1.60mm x 0.80mm)", Stock 1=101035, Supplier 1=Digi-Key, Thickness (Max)="0.039\" (1.00mm)"
C51: library part GRM155R61A475MEAAD, "Multilayer Ceramic Capacitor, 4.7 uF, 10 V, ± 20%, X5R, 0402 [1005 Metric]", Case Code (Imperial)=0402, Case Code (Metric)=1005, Dielectric=1537DielectricType, Manufacturer=Murata, Max Operating Temperature=85°C, Min Operating Temperature=-55°C, Supplier Part Number 1=81-GRM155R61A475MEAD, Tolerance=20%, Voltage Rating=10V, Case/Package=0402, Category="Ceramic Capacitors", ComponentLink1Description=http://www.farnell.com/datasheets/2189109.pdf?src-supplier=Farnell, ComponentLink1URL=http://www.farnell.com/datasheets/2189109.pdf?src-supplier=Farnell, ComponentLink2Description=http://www.farnell.com/datasheets/2189109.pdf?src-supplier=Newark, ComponentLink2URL=http://www.farnell.com/datasheets/2189109.pdf?src-supplier=Newark, ComponentLink3Description=http://www.farnell.com/datasheets/2189109.pdf?src-supplier=Element14, ComponentLink3URL=http://www.farnell.com/datasheets/2189109.pdf?src-supplier=Element14, ComponentLink4Description=http://datasheet.octopart.com/GRM155R61A475MEAAD-Murata-datasheet-68589269.pdf?src-supplier=Distrelec, ComponentLink4URL=http://datasheet.octopart.com/GRM155R61A475MEAAD-Murata-datasheet-68589269.pdf?src-supplier=Distrelec, ComponentLink5Description=http://datasheet.octopart.com/GRM155R61A475MEAAD-Murata-datasheet-68589269.pdf?src-supplier=Farnell, ComponentLink5URL=http://datasheet.octopart.com/GRM155R61A475MEAAD-Murata-datasheet-68589269.pdf?src-supplier=Farnell, ComponentLink6Description=https://search.murata.co.jp/Ceramy/image/img/A01X/G101/ENG/GRM155R61A475MEAA-01.pdf?src-supplier=Digi-Key, ComponentLink6URL=https://search.murata.co.jp/Ceramy/image/img/A01X/G101/ENG/GRM155R61A475MEAA-01.pdf?src-supplier=Digi-Key, ComponentLink7Description=http://datasheet.octopart.com/GRM155R61A475MEAAD-Murata-datasheet-68589269.pdf?src-supplier=Future+Electronics, ComponentLink7URL=http://datasheet.octopart.com/GRM155R61A475MEAAD-Murata-datasheet-68589269.pdf?src-supplier=Future+Electronics, ComponentLink8Description=https://datasheet.octopart.com/GRM155R61A475MEAAD-Murata-datasheet-68589269.pdf?src-supplier=Newark, ComponentLink8URL=https://datasheet.octopart.com/GRM155R61A475MEAAD-Murata-datasheet-68589269.pdf?src-supplier=Newark, ComponentLink9Description=http://datasheet.octopart.com/GRM155R61A475MEAAD-Murata-datasheet-68589269.pdf?src-supplier=Verical, ComponentLink9URL=http://datasheet.octopart.com/GRM155R61A475MEAAD-Murata-datasheet-68589269.pdf?src-supplier=Verical, ComponentLink10Description=https://datasheet.octopart.com/GRM155R61A475MEAAD-Murata-datasheet-165579666.pdf?src-supplier=TME, ComponentLink10URL=https://datasheet.octopart.com/GRM155R61A475MEAAD-Murata-datasheet-165579666.pdf?src-supplier=TME, ComponentLink11Description=http://datasheet.octopart.com/GRM155R61A475MEAAD-Murata-datasheet-68589269.pdf?src-supplier=Quest, ComponentLink11URL=http://datasheet.octopart.com/GRM155R61A475MEAAD-Murata-datasheet-68589269.pdf?src-supplier=Quest, ComponentLink12Description=http://datasheet.octopart.com/GRM155R61A475MEAAD-Murata-datasheet-68589269.pdf?src-supplier=TTI, ComponentLink12URL=http://datasheet.octopart.com/GRM155R61A475MEAAD-Murata-datasheet-68589269.pdf?src-supplier=TTI, ComponentLink13Description=http://datasheet.octopart.com/GRM155R61A475MEAAD-Murata-datasheet-68589269.pdf?src-supplier=NAC+Semi, ComponentLink13URL=http://datasheet.octopart.com/GRM155R61A475MEAAD-Murata-datasheet-68589269.pdf?src-supplier=NAC+Semi, Height=650um, Length=1mm, Manufacturer Part Number=GRM155R61A475MEAAD, Material=4241ConductorMaterial, Mounting Technology="Surface Mount", Packaging="Tape and Reel", Pricing="10000=0,0187, 50000=0,0159, 100000=0,0132 (USD)", RoHS=Yes, RoHS Compliant=Yes, Series=GRM, Stock=930000, Supplier 1=Mouser, Supplier 2=Farnell, Supplier Part Number 2=3581674, Thickness=500um, Voltage Rating (DC)=10V, Width=500um
C52 C53 C54 C55 C56 C57 C58 C59 C60 C61 C62 C63 C71 C72: library part GRM155R61A104KA01D, "CAP CER 0.1UF 10V X5R 0402", Capacitance=0.10µF, Manufacturer="Murata Electronics North America", Operating Temperature="-55°C ~ 85°C", Package / Case="0402 (1005 Metric)", Ratings=-, Supplier Part Number 1=490-1318-6-ND, Temperature Coefficient=X5R, Tolerance=±10%, Voltage - Rated=10V, Applications="General Purpose", Category=Capacitors, ComponentLink1Description=http://www.murata.com/~/media/webrenewal/support/library/catalog/products/capacitor/mlcc/c02e.ashx, ComponentLink1URL=http://www.murata.com/~/media/webrenewal/support/library/catalog/products/capacitor/mlcc/c02e.ashx, Features=-, Height - Seated (Max)=-, Lead Spacing=-, Lead Style=-, Manufacturer Part Number=GRM155R61A104KA01D, Mounting Type="Surface Mount, MLCC", Packaging=Digi-Reel®, Part Status=Active, Pricing 1="1=0.1, 10=0.012, 50=0.0066, 100=0.0055, 250=0.00452, 500=0.00386, 1000=0.003, 5000=0.0025 (USD)", RoHS="RoHS Compliant", Size / Dimension="0.039\" L x 0.020\" W (1.00mm x 0.50mm)", Stock 1=7731132, Supplier 1=Digi-Key, Thickness (Max)="0.022\" (0.55mm)"
C69 C70: library part GRM1555C1E150JA01D, "CAP CER 15 pF 25V C0G 0402", Case Code (Imperial)=0402, Case Code (Metric)=1005, Dielectric=C0G, Dielectric Material=Ceramic, Manufacturer=Murata, Manufacturer Lifecycle Status=NRND, Max Operating Temperature=125°C, Min Operating Temperature=-55°C, Tolerance=5%, Voltage Rating=25V, Case/Package=0402, Category="Ceramic Capacitors", ComponentLink1Description=https://datasheet.octopart.com:443/GRM1555C1E150JA01D-Murata-datasheet-14399184.pdf?src-supplier=Future+Electronics, ComponentLink1URL=https://datasheet.octopart.com:443/GRM1555C1E150JA01D-Murata-datasheet-14399184.pdf?src-supplier=Future+Electronics, ComponentLink2Description=https://datasheet.octopart.com:443/GRM1555C1E150JA01D-Murata-datasheet-22122223.pdf?src-supplier=Future+Electronics, ComponentLink2URL=https://datasheet.octopart.com:443/GRM1555C1E150JA01D-Murata-datasheet-22122223.pdf?src-supplier=Future+Electronics, ComponentLink3Description=https://datasheet.octopart.com:443/GRM1555C1E150JA01D-Murata-datasheet-141274211.pdf?src-supplier=Ciiva, ComponentLink3URL=https://datasheet.octopart.com:443/GRM1555C1E150JA01D-Murata-datasheet-141274211.pdf?src-supplier=Ciiva, ComponentLink4Description=https://datasheet.octopart.com:443/GRM1555C1E150JA01D-Murata-datasheet-140679615.pdf?src-supplier=Ciiva, ComponentLink4URL=https://datasheet.octopart.com:443/GRM1555C1E150JA01D-Murata-datasheet-140679615.pdf?src-supplier=Ciiva, ComponentLink5Description=https://datasheet.octopart.com:443/GRM1555C1E150JA01D-Murata-datasheet-138739066.pdf?src-supplier=Ciiva, ComponentLink5URL=https://datasheet.octopart.com:443/GRM1555C1E150JA01D-Murata-datasheet-138739066.pdf?src-supplier=Ciiva, ComponentLink6Description=https://datasheet.octopart.com/GRM1555C1E150JA01D-Murata-datasheet-12515295.pdf, ComponentLink6URL=https://datasheet.octopart.com/GRM1555C1E150JA01D-Murata-datasheet-12515295.pdf, ComponentLink7Description=https://datasheet.octopart.com/GRM1555C1E150JA01D-Murata-datasheet-12510076.pdf, ComponentLink7URL=https://datasheet.octopart.com/GRM1555C1E150JA01D-Murata-datasheet-12510076.pdf, ComponentLink8Description=https://datasheet.octopart.com/GRM1555C1E150JA01D-Murata-datasheet-11978611.pdf, ComponentLink8URL=https://datasheet.octopart.com/GRM1555C1E150JA01D-Murata-datasheet-11978611.pdf, ComponentLink9Description=https://datasheet.octopart.com/GRM1555C1E150JA01D-Murata-datasheet-10025737.pdf, ComponentLink9URL=https://datasheet.octopart.com/GRM1555C1E150JA01D-Murata-datasheet-10025737.pdf, ComponentLink10Description=https://datasheet.octopart.com/GRM1555C1E150JA01D-Murata-datasheet-8819587.pdf, ComponentLink10URL=https://datasheet.octopart.com/GRM1555C1E150JA01D-Murata-datasheet-8819587.pdf, ComponentLink11Description=http://sigma.octopart.com:80/reach_statement/Murata-company-16.pdf?src-supplier=Compliance+Statements, ComponentLink11URL=http://sigma.octopart.com:80/reach_statement/Murata-company-16.pdf?src-supplier=Compliance+Statements, Depth=500µm, Height=500µm, Lead Free="Lead Free", Length=1mm, Lifecycle Status=NRND, Manufacturer Part Number=GRM1555C1E150JA01D, Material=Ceramic, Mounting Technology="Surface Mount", Number of Terminals=2, Pricing="10000=0.0053, 30000=0.0051, 50000=0.005, 150000=0.0049, 250000=0.0047 (USD)", Radiation Hardening=No, REACH SVHC=Yes, RoHS=Compliant, Schedule B="8532240020, 8532240020|8532240020, 8532240020|8532240020|8532240020, 8532240020|8532240020|8532240020|8532240020", Stock=110000, Supplier="Future Electronics", Supplier Part Number=GRM1555C1E150JA01D, Termination=SMD/SMT, Thickness=500µm, Voltage Rating (DC)=25V, Width=500µm
D50: "DIODE SCHOTTKY 40V 1A SOD123L", Capacitance @ Vr, F=-, Current - Average Rectified (Io)=1A, Current - Reverse Leakage @ Vr="500µA @ 40V", Manufacturer="ON Semiconductor", Operating Temperature - Junction="-55°C ~ 125°C", Package / Case=SOD-123F, Supplier Device Package=SOD-123L, Supplier Part Number 1=MBR140SFT1GOSDKR-ND, Voltage - DC Reverse (Vr) (Max)=40V, Voltage - Forward (Vf) (Max) @ If="550mV @ 1A", Category="Discrete Semiconductor Products", ComponentLink1Description=http://www.onsemi.com/pub_link/Collateral/MBR140SFT1-D.PDF, ComponentLink1URL=http://www.onsemi.com/pub_link/Collateral/MBR140SFT1-D.PDF, Diode Type=Schottky, Manufacturer Part Number=MBR140SFT1G, Mounting Type="Surface Mount", Packaging=Digi-Reel®, Part Status=Active, Pricing 1="1=0.3, 10=0.23, 100=0.1431, 500=0.09782, 1000=0.07519 (GBP)", Reverse Recovery Time (trr)=-, RoHS="RoHS Compliant", Speed="Fast Recovery =< 500ns, > 200mA (Io)", Stock 1=29983, Supplier 1=Digi-Key
D51 D52 D53: "LED GREEN/RED CLEAR CHIP SMD", Case Code (Imperial)=1210, Case Code (Metric)=3225, Color=Green,Red, Forward Current=30mA, Forward Voltage=2V, Lens Color=Colorless, Manufacturer="Vishay Lite-On", Max Operating Temperature=85°C, Max Power Dissipation=75mW, Min Operating Temperature=-55°C, Package Quantity=1, Reverse Voltage=5V, Supplier Part Number 1=160-1409-1-ND, Test Current=20mA, Case/Package=1210, Category=LEDs, ComponentLink1Description=https://datasheet.ciiva.com/11774/0900766b80dc0273-11774195.pdf?src-supplier=RSComponents, ComponentLink1URL=https://datasheet.ciiva.com/11774/0900766b80dc0273-11774195.pdf?src-supplier=RSComponents, ComponentLink2Description=https://datasheet.ciiva.com/15117/getdatasheetpartid-103641-15117440.pdf?src-supplier=Verical, ComponentLink2URL=https://datasheet.ciiva.com/15117/getdatasheetpartid-103641-15117440.pdf?src-supplier=Verical, ComponentLink3Description=https://datasheet.ciiva.com/16366/lite-on20ltst-c155kgjrkt-16366147.pdf?src-supplier=Future+Electronics, ComponentLink3URL=https://datasheet.ciiva.com/16366/lite-on20ltst-c155kgjrkt-16366147.pdf?src-supplier=Future+Electronics, ComponentLink4Description=https://datasheet.ciiva.com/27051/1260277-27051786.pdf?src-supplier=Jameco, ComponentLink4URL=https://datasheet.ciiva.com/27051/1260277-27051786.pdf?src-supplier=Jameco, ComponentLink5Description=https://datasheet.ciiva.com/2110/s-110-ltst-c155kgjrkt-2110800.pdf?src-supplier=Digi-Key, ComponentLink5URL=https://datasheet.ciiva.com/2110/s-110-ltst-c155kgjrkt-2110800.pdf?src-supplier=Digi-Key, ComponentLink6Description=https://datasheet.ciiva.com/2110/s-110-ltst-c155kgjrkt-2110801.pdf?src-supplier=Digi-Key, ComponentLink6URL=https://datasheet.ciiva.com/2110/s-110-ltst-c155kgjrkt-2110801.pdf?src-supplier=Digi-Key, Depth=3.2mm, Dominant Wavelength=631nm, Height=1.1mm, Illumination Color=Green,Red, Lead Free="Lead Free", Length=2.7mm, Lens Style=Diffused,Colorless,Rectangular,Clear, Lens Transparency=Clear, Luminous Intensity=45mcd, Manufacturer Part Number=LTST-C155KGJRKT, Mount="Surface Mount", Number of Elements=2, Number of LEDs=2, Number of Pins=4, Packaging="Tape and Reel", Power Dissipation=75mW, Power Rating=75mW, Pricing 1="1=0.43000, 10=0.28000, 100=0.18670, 500=0.12912, 1000=0.10760 (USD)", Radiation Hardening=No, RoHS=Yes, Stock 1=123598, Supplier 1=Digi-Key, Viewing Angle=130°, Wavelength=639nm, Width=2.7mm
FB50: "FERRITE BEAD 600 OHM 0402 1LN", Case Code (Imperial)=0402, Case Code (Metric)=1005, Current Rating=300mA, DC Resistance (DCR)=520mR, Frequency=100MHz, Manufacturer=Murata, Max Operating Temperature=125°C, Min Operating Temperature=-55°C, Package Quantity=10000, Supplier Part Number 1=490-1006-1-ND, Tolerance=25%, Case/Package=0402, Category=Inductors, ComponentLink1Description=https://datasheet.ciiva.com/11799/0900766b811b5866-11799226.pdf?src-supplier=RSComponents, ComponentLink1URL=https://datasheet.ciiva.com/11799/0900766b811b5866-11799226.pdf?src-supplier=RSComponents, ComponentLink2Description=https://datasheet.ciiva.com/29347/442210-da-01-en-chip-drossel-0402-600r-300ma-1-0x0-5mm-29347879.pdf?src-supplier=Conrad, ComponentLink2URL=https://datasheet.ciiva.com/29347/442210-da-01-en-chip-drossel-0402-600r-300ma-1-0x0-5mm-29347879.pdf?src-supplier=Conrad, ComponentLink3Description=https://datasheet.ciiva.com/41449/001172163-da-01-en-drossel-0402-600r-1-0x0-5mm-10000st-41449450.pdf?src-supplier=Conrad, ComponentLink3URL=https://datasheet.ciiva.com/41449/001172163-da-01-en-drossel-0402-600r-1-0x0-5mm-10000st-41449450.pdf?src-supplier=Conrad, ComponentLink4Description=https://datasheet.ciiva.com/6212/l0110s0100blm15ag-sn-6212565.pdf?src-supplier=Digi-Key, ComponentLink4URL=https://datasheet.ciiva.com/6212/l0110s0100blm15ag-sn-6212565.pdf?src-supplier=Digi-Key, ComponentLink5Description=https://datasheet.ciiva.com/6212/l0110s0100blm15ag-sn-6212519.pdf?src-supplier=Digi-Key, ComponentLink5URL=https://datasheet.ciiva.com/6212/l0110s0100blm15ag-sn-6212519.pdf?src-supplier=Digi-Key, ComponentLink6Description=https://datasheet.ciiva.com/1466/5144-1466744.pdf?src-supplier=Element14, ComponentLink6URL=https://datasheet.ciiva.com/1466/5144-1466744.pdf?src-supplier=Element14, ComponentLink7Description=https://datasheet.ciiva.com/6212/l0110s0100blm15ag-sn-6212520.pdf?src-supplier=Digi-Key, ComponentLink7URL=https://datasheet.ciiva.com/6212/l0110s0100blm15ag-sn-6212520.pdf?src-supplier=Digi-Key, ComponentLink8Description=https://datasheet.ciiva.com/1466/5144-1466745.pdf?src-supplier=Element14, ComponentLink8URL=https://datasheet.ciiva.com/1466/5144-1466745.pdf?src-supplier=Element14, ComponentLink9Description=https://datasheet.ciiva.com/8510/l0110s0100blm15ag-sn-8510909.pdf?src-supplier=Avnet, ComponentLink9URL=https://datasheet.ciiva.com/8510/l0110s0100blm15ag-sn-8510909.pdf?src-supplier=Avnet, ComponentLink10Description=https://datasheet.ciiva.com/14122/blm-series-eng-tds-14122894.pdf?src-supplier=Distrelec, ComponentLink10URL=https://datasheet.ciiva.com/14122/blm-series-eng-tds-14122894.pdf?src-supplier=Distrelec, ComponentLink11Description=https://datasheet.ciiva.com/8084/l0110s0100blm15ag-sn-8084271.pdf?src-supplier=Avnet, ComponentLink11URL=https://datasheet.ciiva.com/8084/l0110s0100blm15ag-sn-8084271.pdf?src-supplier=Avnet, Core Material=Ferrite, DC Current=300mA, Depth=0.55mm, Height=0.5mm, Impedance=600R, Lead Free="Lead Free", Length=1mm, Manufacturer Part Number=BLM15AG601SN1D, Material=Steel,Ferrite, Max Current Rating=300mA, Max DC Current=300mA, Military Standard=Not, Number of Circuits=1, Number of Lines=1, Number of Pins=2, Packaging="Tape and Reel", Pricing 1="1=0.10000, 10=0.07600, 25=0.06960, 50=0.06260, 100=0.04590, 250=0.03336, 500=0.03058, 1000=0.02641, 5000=0.02085 (USD)", Radiation Hardening=No, REACH SVHC="No SVHC", RoHS=Yes, Shielding=Unshielded, Stock 1=436370, Supplier 1=Digi-Key, Termination=SMD/SMT, Test Frequency=100MHz, Width=0.5mm
L50: library part DFE201612E-2R2M=P2, "Inductor Power Shielded Wirewound 2.2uH 20% 1MHz Metal 1.8A 0.116Ohm DCR 0806 T/R", Current Rating=1.8A, Inductance Tolerance=20%, Manufacturer=Murata, Manufacturer Part Number=DFE201612E-2R2M=P2, Max Operating Temperature=125°C, Min Operating Temperature=-40°C, Saturation Current=2.4A, Supplier Part Number=81-DFE201612E-2R2MP2, Test Frequency=1MHz, Category="Fixed Inductors", ComponentLink1Description=http://www.farnell.com/datasheets/2339714.pdf?src-supplier=Farnell, ComponentLink1URL=http://www.farnell.com/datasheets/2339714.pdf?src-supplier=Farnell, ComponentLink2Description=https://search.murata.co.jp/Ceramy/image/img/P02/J(E)TE243A-0006.pdf?src-supplier=Digi-Key, ComponentLink2URL=https://search.murata.co.jp/Ceramy/image/img/P02/J(E)TE243A-0006.pdf?src-supplier=Digi-Key, ComponentLink3Description=http://www.farnell.com/datasheets/2339714.pdf?src-supplier=Newark, ComponentLink3URL=http://www.farnell.com/datasheets/2339714.pdf?src-supplier=Newark, ComponentLink4Description=https://datasheet.octopart.com/DFE201612E-2R2M%3DP2-Murata-datasheet-150582460.pdf?src-supplier=Arrow.cn, ComponentLink4URL=https://datasheet.octopart.com/DFE201612E-2R2M%3DP2-Murata-datasheet-150582460.pdf?src-supplier=Arrow.cn, ComponentLink5Description=https://search.murata.co.jp/Ceramy/image/img/P02/J(E)TE243A-0006.pdf?src-supplier=Digikey, ComponentLink5URL=https://search.murata.co.jp/Ceramy/image/img/P02/J(E)TE243A-0006.pdf?src-supplier=Digikey, ESR=116mR, Height=1.2mm, Packaging=13Packaging, Pricing="3000=0,0929 (USD)", RMS Current (Irms)=1.8A, RoHS=Yes, Stock=102000, Supplier=Mouser, Supplier 1=Mouser, Supplier 2=Digikey, Supplier 3=Digikey, Supplier Part Number 1=81-DFE201612E-2R2MP2, Supplier Part Number 2=490-DFE201612E-2R2M=P2CT-ND, Supplier Part Number 3=490-DFE201612E-2R2M=P2DKR-ND
L51: library part AOTA-B201610S3R3-101-T, "General Purpose Inductor, 3.3uH, 20%, 1 Element, SMD, 0806", Case/Package=0806, DC Resistance (DCR)=140mΩ, Manufacturer=Abracon, Max Current Rating=2.1A, Max Operating Temperature=125°C, Min Operating Temperature=-40°C, Self Resonant Frequency=21MHz, Test Frequency=1MHz, Tolerance=20%, Category="Fixed Inductors", ComponentLink1Description=https://datasheet.octopart.com:443/AOTA-B201610S3R3-101-T-Abracon-datasheet-188850378.pdf?src-supplier=HQonline, ComponentLink1URL=https://datasheet.octopart.com:443/AOTA-B201610S3R3-101-T-Abracon-datasheet-188850378.pdf?src-supplier=HQonline, ComponentLink2Description=http://sigma.octopart.com:80/conflict_mineral_statement/Abracon-company-27.pdf?src-supplier=Compliance+Statements, ComponentLink2URL=http://sigma.octopart.com:80/conflict_mineral_statement/Abracon-company-27.pdf?src-supplier=Compliance+Statements, Export Control Classification Number (ECCN) Code=EAR99, Harmonized Tariff Schedule (HTS) Code=8504.50.80.00, Height=1mm, Introduction Date=2024-09-16, Length=2mm, Lifecycle Status=Production, Manufacturer Part Number=AOTA-B201610S3R3-101-T, Number of Circuits=1, Number of Terminals=2, Pricing="3000=0.0966, 6000=0.095, 9000=0.094, 12000=0.0933, 15000=0.0911 (USD)", RoHS=Compliant, Shielding=Shielded, Stock=9000, Supplier="Future Electronics", Supplier Part Number=AOTA-B201610S3R3-101-T, Width=1.6mm
P50: "Conn FFC/FPC Connector SKT 11 POS 0.3mm Solder RA SMD Easy-On™ T/R", Manufacturer=Molex, Supplier Part Number=538-504754-1100, Checked=FALSE, ComponentLink1Description=https://datasheet.octopart.com/504754-1100-Molex-datasheet-169278456.pdf?src-supplier=Farnell, ComponentLink1URL=https://datasheet.octopart.com/504754-1100-Molex-datasheet-169278456.pdf?src-supplier=Farnell, ComponentLink2Description=http://datasheet.octopart.com/5047541100-Molex-datasheet-38188796.pdf?src-supplier=Onlinecomponents.com, ComponentLink2URL=http://datasheet.octopart.com/5047541100-Molex-datasheet-38188796.pdf?src-supplier=Onlinecomponents.com, ComponentLink3Description=http://datasheet.octopart.com/5047541100-Molex-datasheet-38188796.pdf?src-supplier=Verical, ComponentLink3URL=http://datasheet.octopart.com/5047541100-Molex-datasheet-38188796.pdf?src-supplier=Verical, ComponentLink4Description=http://datasheet.octopart.com/5047541100-Molex-datasheet-38188796.pdf?src-supplier=Avnet, ComponentLink4URL=http://datasheet.octopart.com/5047541100-Molex-datasheet-38188796.pdf?src-supplier=Avnet, ComponentLink5Description=http://datasheet.octopart.com/5047541100-Molex-datasheet-38188796.pdf?src-supplier=TTI, ComponentLink5URL=http://datasheet.octopart.com/5047541100-Molex-datasheet-38188796.pdf?src-supplier=TTI, ComponentLink6Description=http://datasheet.octopart.com/5047541100-Molex-datasheet-38188796.pdf?src-supplier=Electro+Sonic, ComponentLink6URL=http://datasheet.octopart.com/5047541100-Molex-datasheet-38188796.pdf?src-supplier=Electro+Sonic, ComponentLink7Description=https://datasheet.octopart.com/504754-1100-Molex-datasheet-154754160.pdf?src-supplier=Master+Electronics, ComponentLink7URL=https://datasheet.octopart.com/504754-1100-Molex-datasheet-154754160.pdf?src-supplier=Master+Electronics, Manufacturer Part Number=504754-1100, Pricing="1=0.77, 10=0.628, 50=0.544, 100=0.512, 1000=0.426, 10000=0.355 (USD)", RoHS=No, Stock=6459, Supplier=Mouser, Supplier 1=Mouser, Supplier Part Number 1=538-504754-1100, System=Connector
R54: library part ERJ-2RKF1004X, "RES SMD 1M OHM 1% 1/10W 0402", Manufacturer="Panasonic Electronic Components", Operating Temperature="-55°C ~ 155°C", Package / Case="0402 (1005 Metric)", Power (Watts)="0.1W, 1/10W", Resistance (Ohms)=1M, Supplier Device Package=0402, Supplier Part Number 1=P1.00MLDKR-ND, Temperature Coefficient=±100ppm/°C, Tolerance=±1%, Category=Resistors, ComponentLink1Description=https://industrial.panasonic.com/cdbs/www-data/pdf/RDA0000/AOA0000C283.pdf, ComponentLink1URL=https://industrial.panasonic.com/cdbs/www-data/pdf/RDA0000/AOA0000C283.pdf, Composition="Thick Film", Failure Rate=-, Features="Automotive AEC-Q200", Height - Seated (Max)="0.016\" (0.40mm)", Manufacturer Part Number=ERJ-2RKF1004X, Number of Terminations=2, Packaging=Digi-Reel®, Part Status=Active, Pricing 1="1=0.1, 10=0.025, 25=0.018, 50=0.0136, 100=0.01, 250=0.00764, 500=0.00612, 1000=0.00451, 5000=0.00323 (USD)", RoHS="RoHS Compliant", Size / Dimension="0.039\" L x 0.020\" W (1.00mm x 0.50mm)", Stock 1=1590446, Supplier 1=Digi-Key